# Altium PCB rocket_main.PcbDoc (part 1 of 2)
Units mil, origin at the board's own origin, x right, y up, seen from the top; angles counter-clockwise.
Board outline 3500 x 8650 mil, 4 copper layers (Top Copper, Signal Layer 1, Signal Layer 2, Bottom Copper), stack 61.811 mil thick; 167 components, 107 nets, 665 pads, 215 vias.
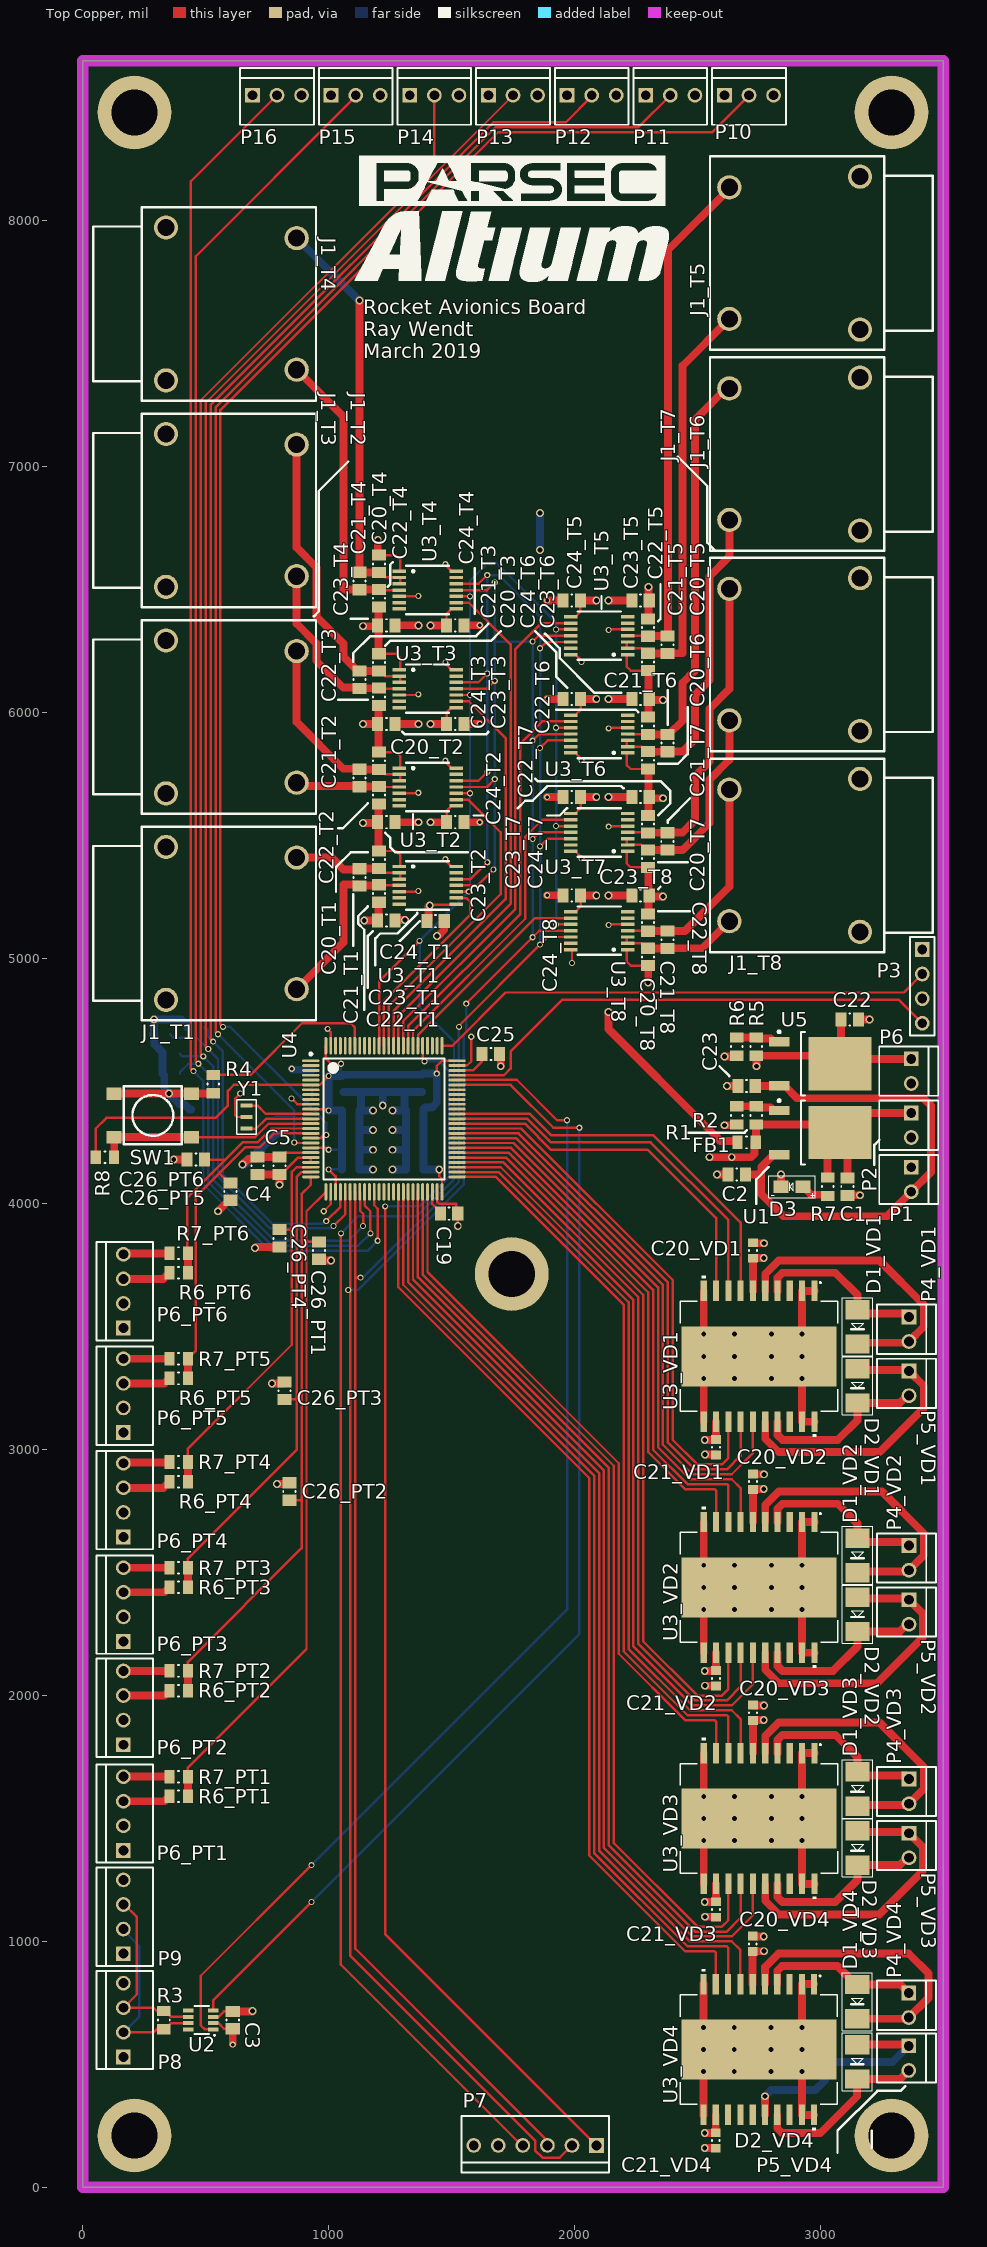
[diagram p0: Top Copper view]
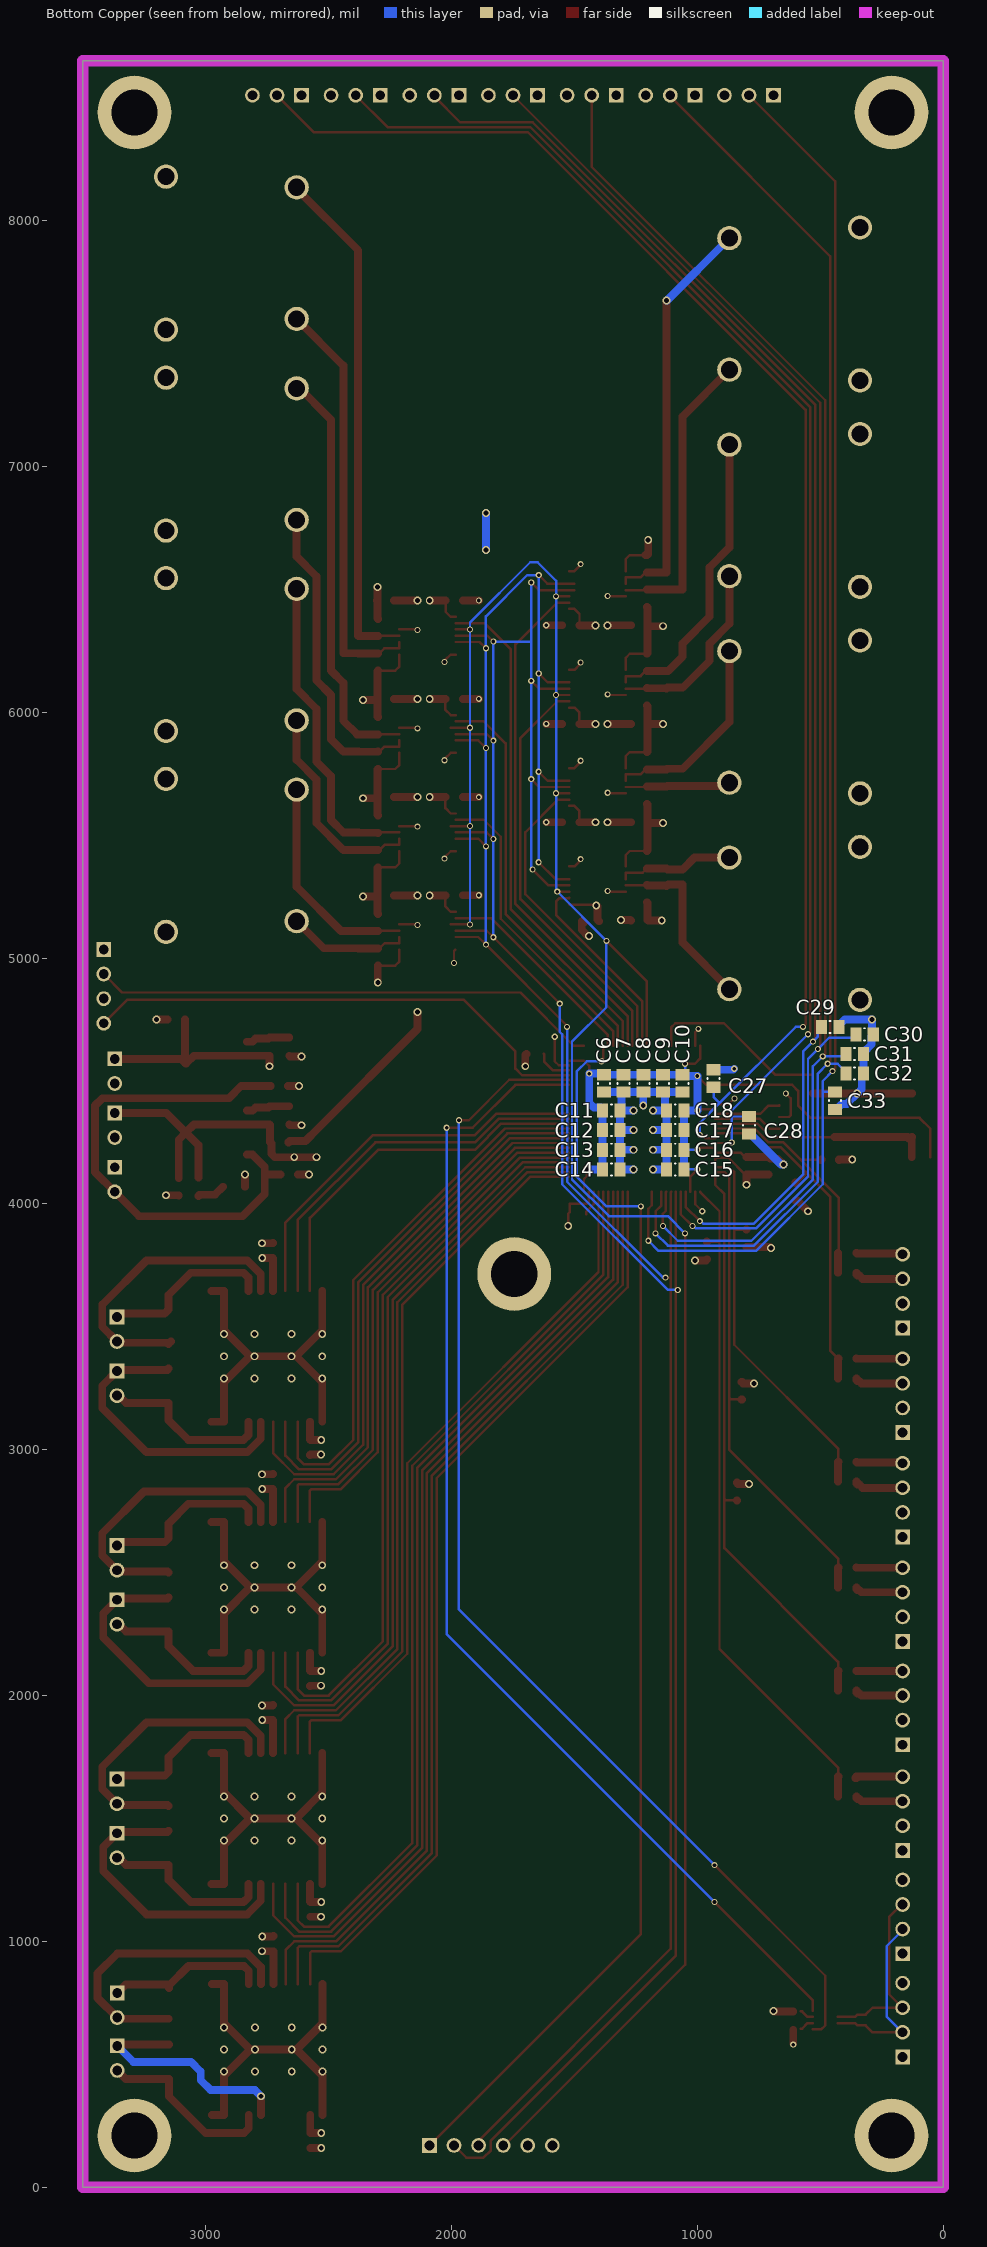
[diagram p1: Bottom Copper view, seen from below]
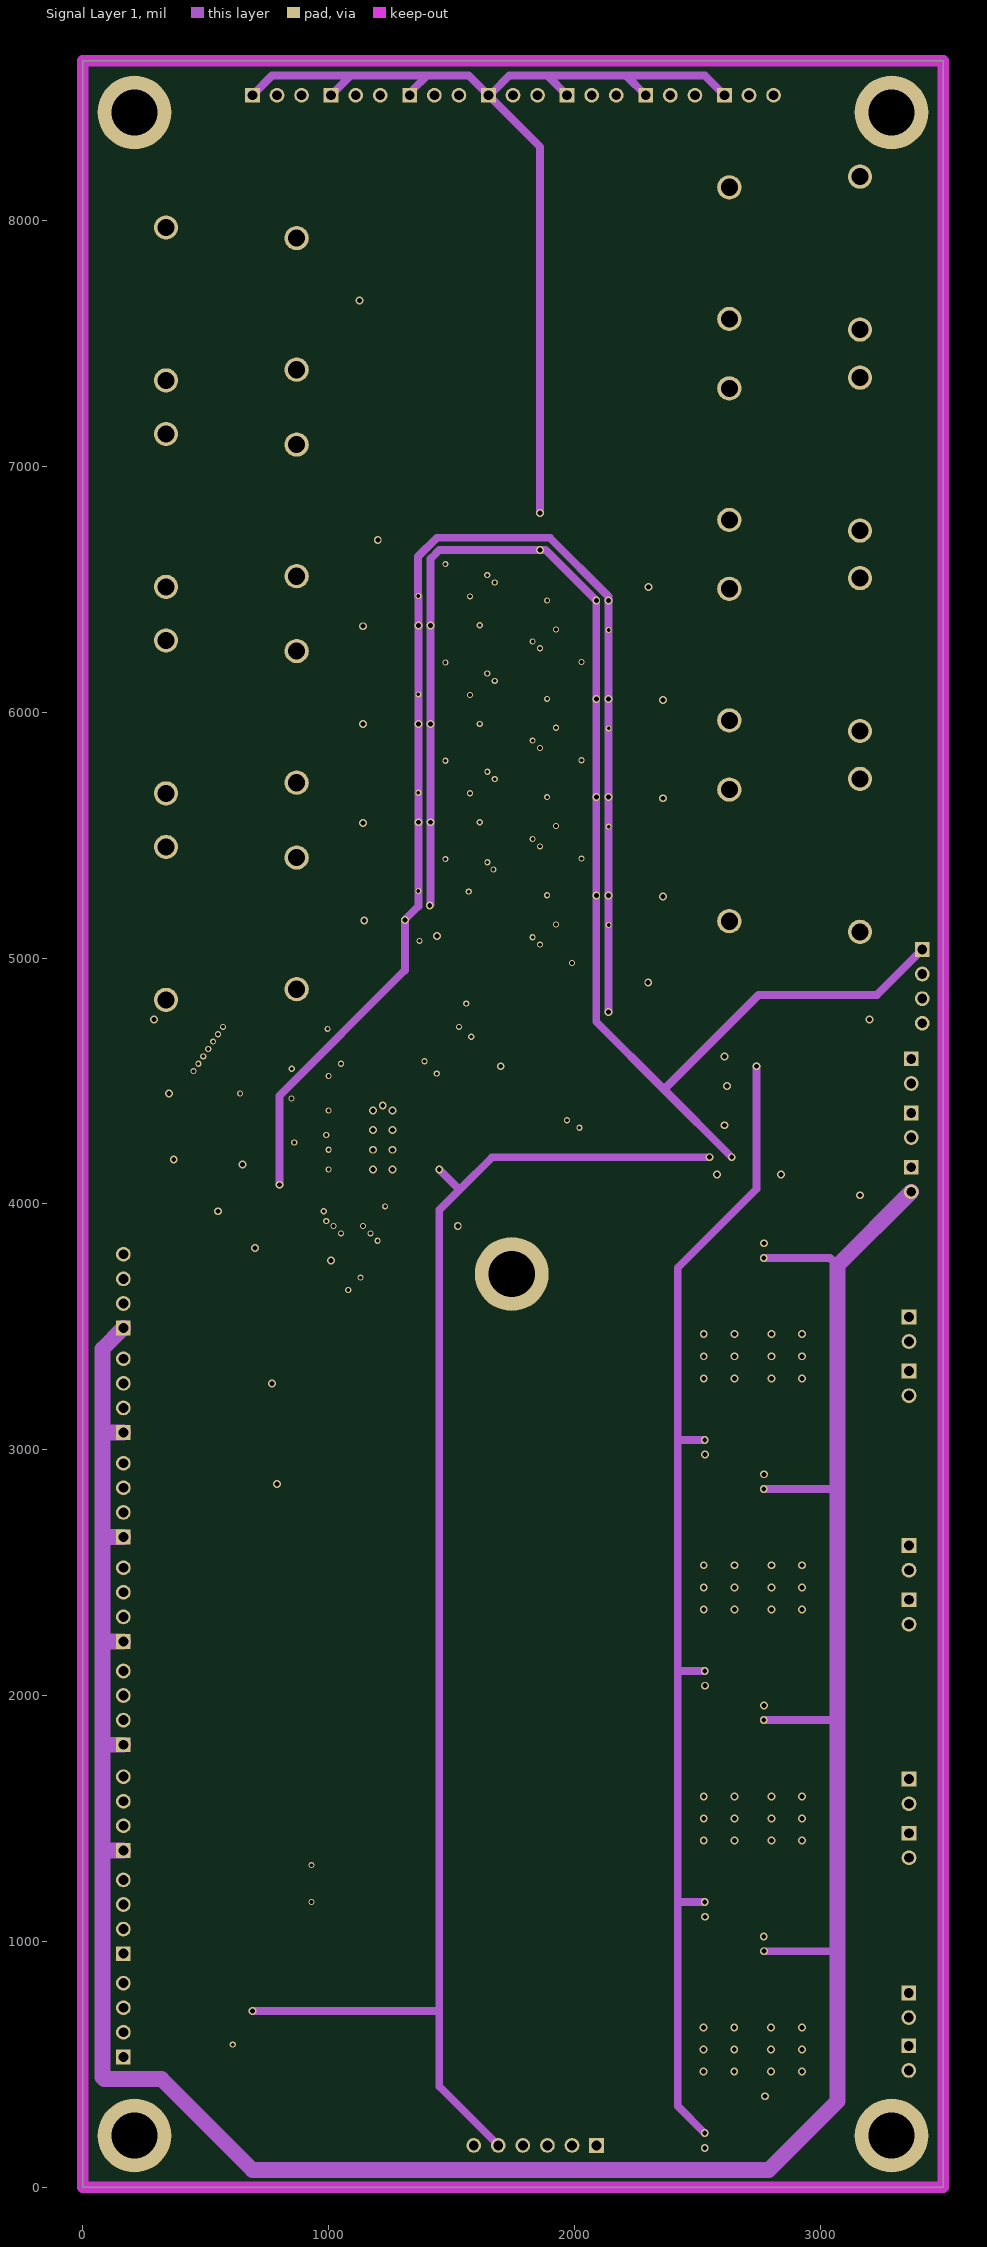
[diagram p2: Signal Layer 1]
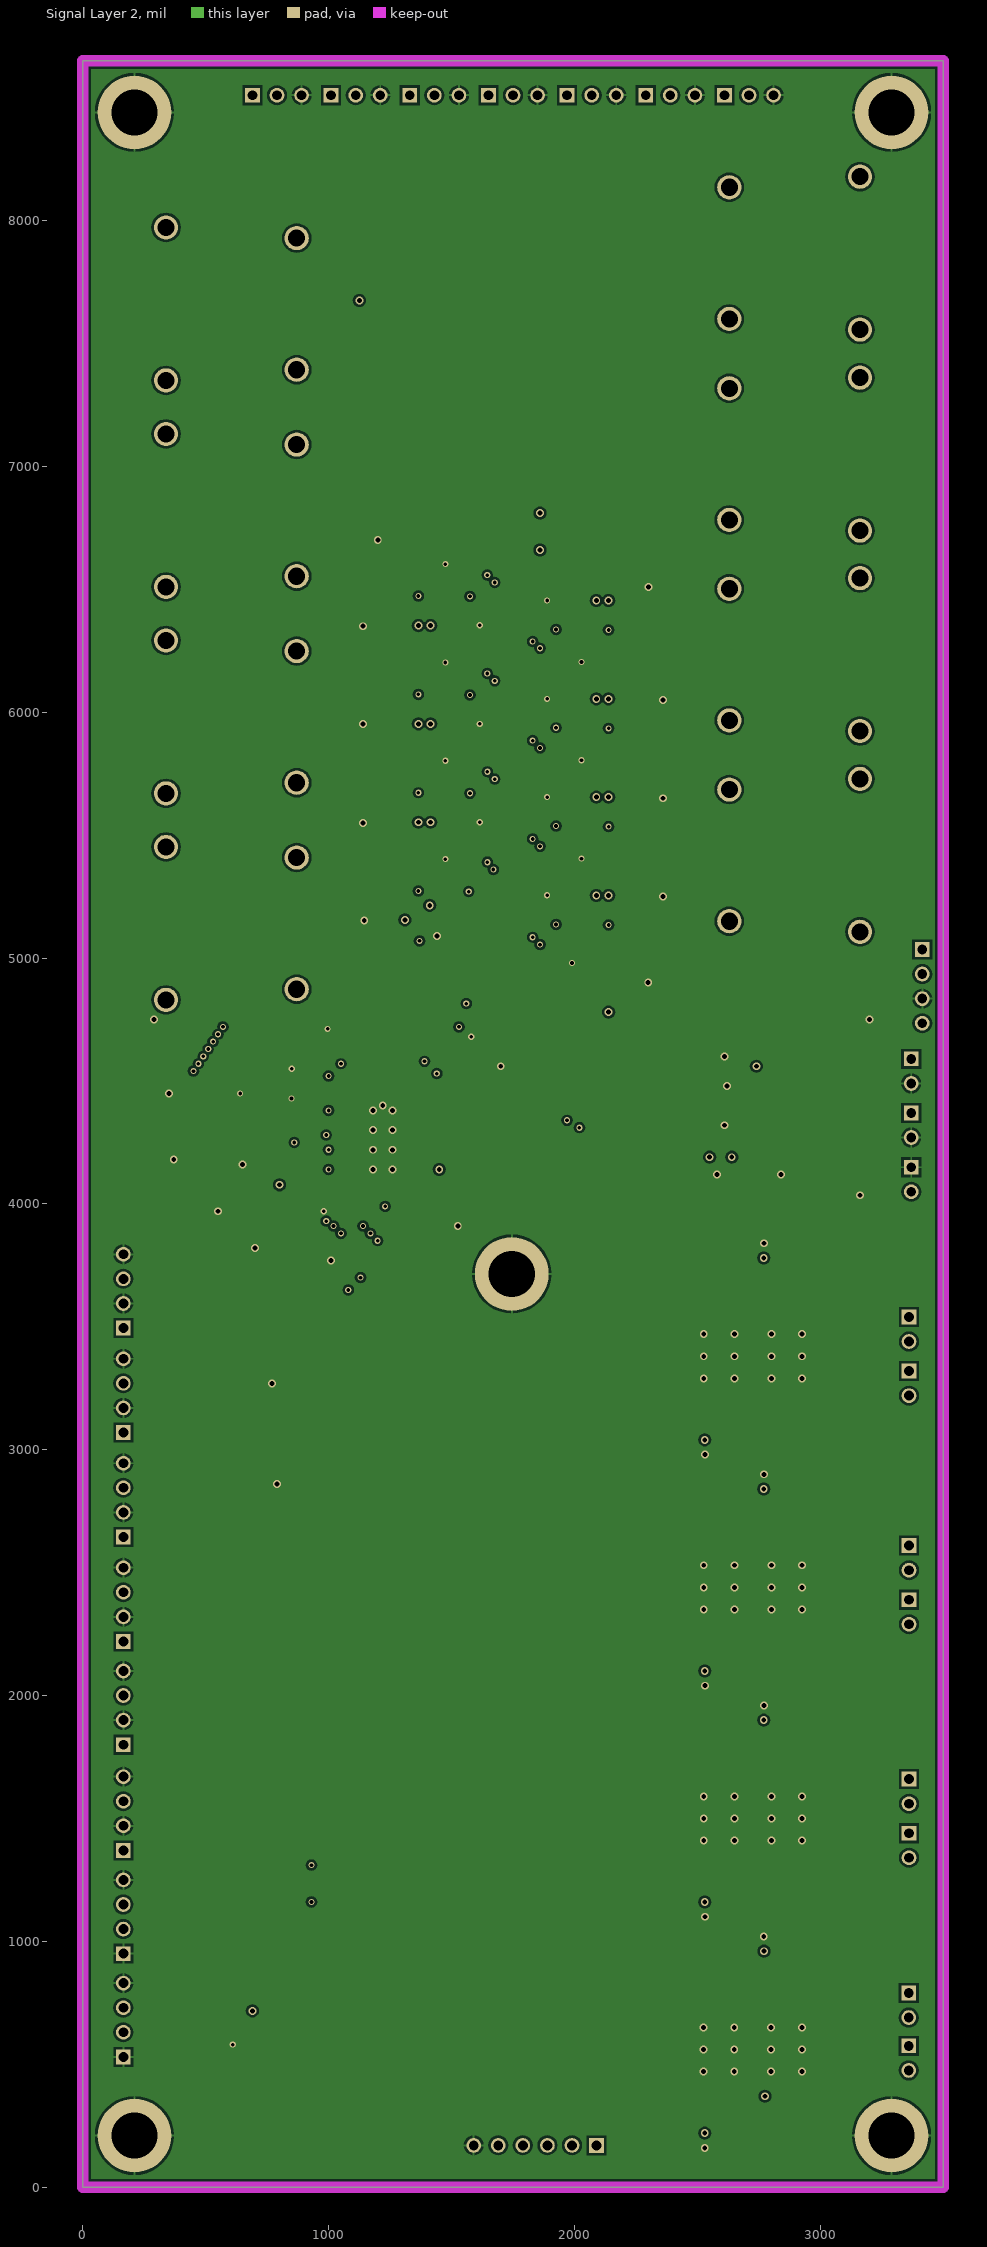
[diagram p3: Signal Layer 2]
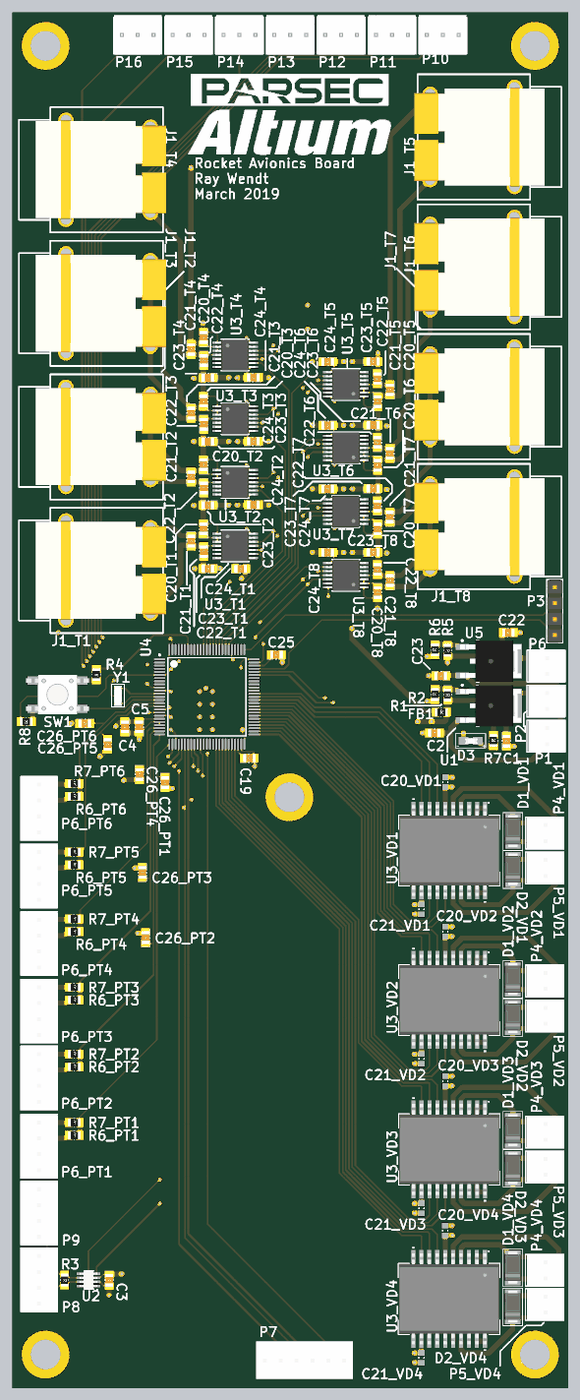
[diagram p5: 3D render of the assembled board from above, using the file's embedded part models]
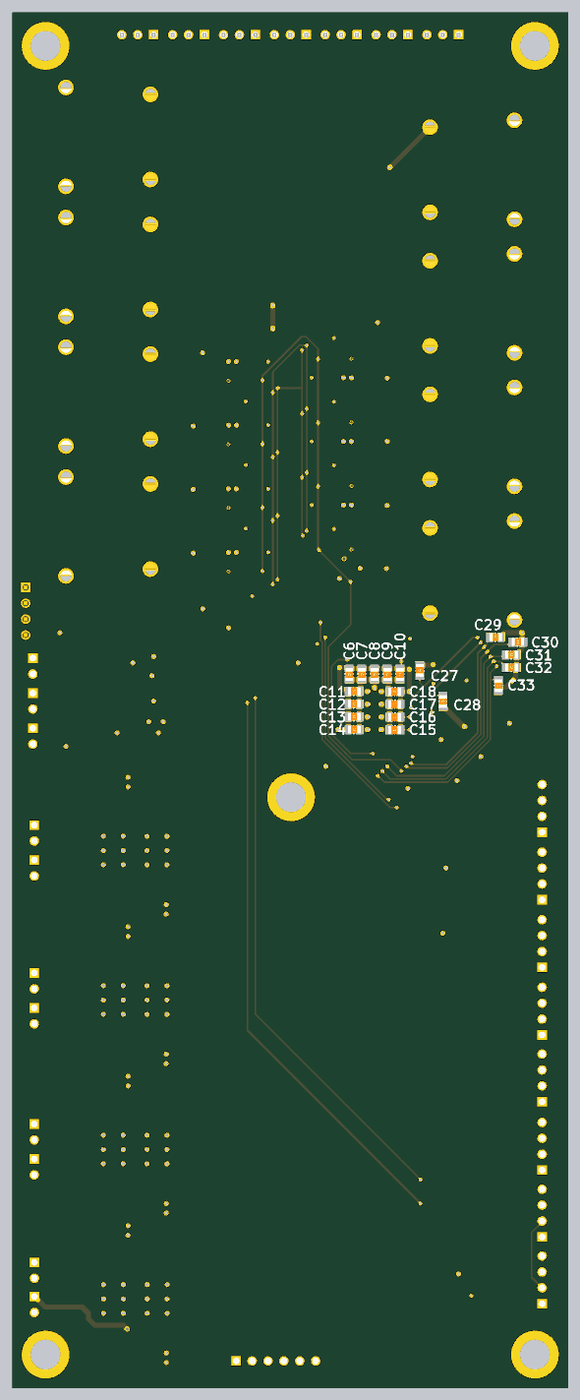
[diagram p6: 3D render of the assembled board from below, using the file's embedded part models]

## Layer stack, top to bottom
Top Mask: solder mask 0.5906, Solder Resist, Dk 3.8
Top Copper: signal copper 1.3779
Dielectric 1: prepreg 3.937, 2313, Dk 4.05
Signal Layer 1: signal copper 0.6889
Core: core 49.8031, FR-4, Dk 4.5
Signal Layer 2: signal copper 0.6889
Dielectric 2: prepreg 3.937, 2313, Dk 4.05
Bottom Copper: signal copper 1.3779
Bottom Mask: solder mask 0.5906, Solder Resist, Dk 3.8

## Board outline
0,0 3500,0 3500,8650 0,8650

## Design rules (kind name [scope] priority, off if disabled: settings)
Clearance [All] p1: gap=10 ignorepadtopadclearanceinfootprint=FALSE except(0: Arc-Hole Track-Hole SMDPad-Hole THPad-Hole Via-Hole Fill-Hole Poly-Hole Region-Hole Text-Hole; 3.5: Arc-Arc Arc-Track Track-Track; 5: Arc-SMDPad Arc-Via Track-SMDPad Track-Via SMDPad-SMDPad)
HoleSize [All] p1: absolutevalues=TRUE maxlimit=200 minlimit=7.87 maxpercent=80.000 minpercent=20.000
MinimumSolderMaskSliver [All] p1: minsoldermaskwidth=1.5
PlaneConnect PlaneConnect_1 [IsVia] p1: planeconnectstyle=Direct reliefexpansion=20 reliefentries=4 reliefconductorwidth=10 reliefairgap=10
PlaneConnect [All] p2: planeconnectstyle=Relief reliefexpansion=20 reliefentries=4 reliefconductorwidth=10 reliefairgap=10
PolygonConnect via_direct [IsVia] p1: connectstyle=Direct reliefconductorwidth=10 reliefentries=4 polygonreliefangle="90 Angle" airgapwidth=10
PolygonConnect [All] p2: connectstyle=Relief reliefconductorwidth=10 reliefentries=4 polygonreliefangle="90 Angle" airgapwidth=10
RoutingVias [All] p1: holewidth=15 width=25 viastyle="Through Hole" minholewidth=10 minwidth=15 maxholewidth=20 maxwidth=32
SilkToSilkClearance [All] p1: silktosilkclearance=6
SilkToSolderMaskClearance [IsPad] p1: minsilkscreentomaskgap=4 clearancetoexposedcopper=TRUE
SolderMaskExpansion [All] p1: expansion=4
Width [All] p1: maxlimit=64 minlimit=10 preferedwidth=10
25 further rules are at their usual default settings.

## Classes and differential pairs
component class IMU: P7
channel class valve_schematic: VD1 VD2 VD3 VD4
channel class Temp_converter: T1 T2 T3 T4 T5 T6 T7 T8
channel class Pressure_Transducer: PT1 PT2 PT3 PT4 PT5 PT6
net class SOL_B_inD[1..4]: SOL_B_inD1 SOL_B_inD2 SOL_B_inD3 SOL_B_inD4 SOL_B_inD5
net class SOL_B_inC[1..4]: SOL_B_inC1 SOL_B_inC2 SOL_B_inC3 SOL_B_inC4 SOL_B_inC5
net class SOL_A_inD[1..4]: SOL_A_inD1 SOL_A_inD2 SOL_A_inD3 SOL_A_inD4 SOL_A_inD5
net class SOL_A_inC[1..4]: SOL_A_inC1 SOL_A_inC2 SOL_A_inC3 SOL_A_inC4 SOL_A_inC5
net class ENABLEB[1..4]: ENABLEB1 ENABLEB2 ENABLEB3 ENABLEB4
net class ENABLEA[1..4]: ENABLEA1 ENABLEA2 ENABLEA3 ENABLEA4
net class CS[1..8]: CS1 CS2 CS3 CS4 CS5 CS6 CS7 CS8 CS9
net class ADC_IN[1..6]: ADC_IN1 ADC_IN2 ADC_IN3 ADC_IN4 ADC_IN5 ADC_IN6
component class VD4: C20_VD4 C21_VD4 D1_VD4 D2_VD4 P4_VD4 P5_VD4 U3_VD4
component class VD3: C20_VD3 C21_VD3 D1_VD3 D2_VD3 P4_VD3 P5_VD3 U3_VD3
component class VD2: C20_VD2 C21_VD2 D1_VD2 D2_VD2 P4_VD2 P5_VD2 U3_VD2
component class VD1: C20_VD1 C21_VD1 D1_VD1 D2_VD1 P4_VD1 P5_VD1 U3_VD1
component class T8: C20_T8 C21_T8 C22_T8 C23_T8 C24_T8 J1_T8 U3_T8
component class T7: C20_T7 C21_T7 C22_T7 C23_T7 C24_T7 J1_T7 U3_T7
component class T6: C20_T6 C21_T6 C22_T6 C23_T6 C24_T6 J1_T6 U3_T6
component class T5: C20_T5 C21_T5 C22_T5 C23_T5 C24_T5 J1_T5 U3_T5
component class T4: C20_T4 C21_T4 C22_T4 C23_T4 C24_T4 J1_T4 U3_T4
component class T3: C20_T3 C21_T3 C22_T3 C23_T3 C24_T3 J1_T3 U3_T3
component class T2: C20_T2 C21_T2 C22_T2 C23_T2 C24_T2 J1_T2 U3_T2
component class T1: C20_T1 C21_T1 C22_T1 C23_T1 C24_T1 J1_T1 U3_T1
component class rocket_main_micro: C3 C4 C5 C6 C7 C8 C9 C10 C11 C12 C13 C14 C15 C16 C17 C18 C19 C25 C27 C28 C29 C30 C31 C32 C33 P3 P8 P9 P10 P11 P12 P13 P14 P15 P16 R3 R4 R8 SW1 U2 U4 Y1
component class PT6: C26_PT6 P6_PT6 R6_PT6 R7_PT6
component class PT5: C26_PT5 P6_PT5 R6_PT5 R7_PT5
component class PT4: C26_PT4 P6_PT4 R6_PT4 R7_PT4
component class PT3: C26_PT3 P6_PT3 R6_PT3 R7_PT3
component class PT2: C26_PT2 P6_PT2 R6_PT2 R7_PT2
component class PT1: C26_PT1 P6_PT1 R6_PT1 R7_PT1
component class POWER: C1 C2 C22 C23 D3 FB1 P1 P2 P6 R1 R2 R5 R6 R7 U1 U5

## Components (designator, comment, footprint, x,y, rotation, side; value= is the part's Value field where it differs from the comment)
C1 "1uF" C0805 3110,4070 r270 top
C2 "0.1uF" C0805 2660,4119.57 r180 top
C3 "100n" C0805 610,680 r270 top
C4 "100n" C0805 710,4155 r90 top
C5 "1u" C0805 800,4155 r90 top
C6 "100n" C0805 1380,4490 r270 bottom
C7 "100n" C0805 1300,4490 r270 bottom
C8 "100n" C0805 1220,4490 r270 bottom
C9 "100n" C0805 1140,4490 r270 bottom
C10 "4u7" C0805 1060,4490 r270 bottom
C11 "100n" C0805 1350,4380 r180 bottom
C12 "100n" C0805 1350,4300 r180 bottom
C13 "100n" C0805 1350,4220 r180 bottom
C14 "100n" C0805 1350,4140 r180 bottom
C15 "100n" C0805 1090,4140 r0 bottom
C16 "100n" C0805 1090,4220 r0 bottom
C17 "100n" C0805 1090,4300 r0 bottom
C18 "100n" C0805 1090,4380 r0 bottom
C19 "2u2" C0805 1490,3960 r0 top
C20_T1 "0.01uF" C0805 1204.92,5400.2 r90 top (schematic designator C20)
C20_T2 "0.01uF" C0805 1204.92,5802.6 r90 top (schematic designator C20)
C20_T3 "0.01uF" C0805 1204.92,6202.6 r90 top (schematic designator C20)
C20_T4 "0.01uF" C0805 1205.04,6603.82 r90 top (schematic designator C20)
C20_T5 "0.01uF" C0805 2299.29,6204.57 r270 top (schematic designator C20)
C20_T6 "0.01uF" C0805 2298.74,5804.57 r270 top (schematic designator C20)
C20_T7 "0.01uF" C0805 2298.74,5404.57 r270 top (schematic designator C20)
C20_T8 "0.01uF" C0805 2298.74,5004.57 r270 top (schematic designator C20)
C20_VD1 "1 uF" C0603 2726,3810 r90 top (schematic designator C20)
C20_VD2 "1 uF" C0603 2726,2870 r90 top (schematic designator C20)
C20_VD3 "1 uF" C0603 2726,1930 r90 top (schematic designator C20)
C20_VD4 "1 uF" C0603 2725,990 r90 top (schematic designator C20)
C21_T1 "0.1uF" C0805 1124.92,5328.03 r270 top (schematic designator C21)
C21_T2 "0.1uF" C0805 1125.57,5732.6 r270 top (schematic designator C21)
C21_T3 "0.1uF" C0805 1124.92,6132.6 r270 top (schematic designator C21)
C21_T4 "0.1uF" C0805 1124.92,6533.82 r270 top (schematic designator C21)
C21_T5 "0.1uF" C0805 2378.86,6274.57 r90 top (schematic designator C21)
C21_T6 "0.1uF" C0805 2378.21,5874.57 r90 top (schematic designator C21)
C21_T7 "0.1uF" C0805 2377.78,5474.57 r90 top (schematic designator C21)
C21_T8 "0.1uF" C0805 2378.86,5074.57 r90 top (schematic designator C21)
C21_VD1 "1 uF" C0603 2576,3010 r270 top (schematic designator C21)
C21_VD2 "1 uF" C0603 2576,2070 r270 top (schematic designator C21)
C21_VD3 "1 uF" C0603 2576,1130 r270 top (schematic designator C21)
C21_VD4 "1 uF" C0603 2575,190 r270 top (schematic designator C21)
C22 "1uF" C0805 3120,4750 r0 top
C22_T1 "0.01uF" C0805 1204.92,5262.6 r270 top (schematic designator C22)
C22_T2 "0.01uF" C0805 1204.92,5662.6 r270 top (schematic designator C22)
C22_T3 "0.01uF" C0805 1204.92,6062.6 r270 top (schematic designator C22)
C22_T4 "0.01uF" C0805 1205.04,6463.82 r270 top (schematic designator C22)
C22_T5 "0.01uF" C0805 2298.74,6344.57 r90 top (schematic designator C22)
C22_T6 "0.01uF" C0805 2298.74,5944.57 r90 top (schematic designator C22)
C22_T7 "0.01uF" C0805 2298.74,5544.57 r90 top (schematic designator C22)
C22_T8 "0.01uF" C0805 2299.29,5144.57 r90 top (schematic designator C22)
C23 "0.1uF" C0805 2700,4480.24 r180 top
C23_T1 "0.1uF" C0805 1234.92,5152.6 r180 top (schematic designator C23)
C23_T2 "0.1uF" C0805 1234.92,5552.6 r180 top (schematic designator C23)
C23_T3 "0.1uF" C0805 1234.92,5952.6 r180 top (schematic designator C23)
C23_T4 "0.1uF" C0805 1234.92,6353.82 r180 top (schematic designator C23)
C23_T5 "0.1uF" C0805 2268.86,6454.57 r0 top (schematic designator C23)
C23_T6 "0.1uF" C0805 2268.86,6054.57 r0 top (schematic designator C23)
C23_T7 "0.1uF" C0805 2268.86,5654.57 r0 top (schematic designator C23)
C23_T8 "0.1uF" C0805 2268.86,5254.57 r0 top (schematic designator C23)
C24_T1 "0.1uF" C0805 1435,5150 r0 top (schematic designator C24)
C24_T2 "0.1uF" C0805 1514.92,5552.6 r0 top (schematic designator C24)
C24_T3 "0.1uF" C0805 1514.92,5952.6 r0 top (schematic designator C24)
C24_T4 "0.1uF" C0805 1514.92,6353.82 r0 top (schematic designator C24)
C24_T5 "0.1uF" C0805 1988.86,6454.57 r180 top (schematic designator C24)
C24_T6 "0.1uF" C0805 1988.86,6054.57 r180 top (schematic designator C24)
C24_T7 "0.1uF" C0805 1988.86,5654.57 r180 top (schematic designator C24)
C24_T8 "0.1uF" C0805 1988.86,5255.28 r180 top (schematic designator C24)
C25 "2u2" C0805 1660,4610 r0 top
C26_PT1 "100n" C0805 960.98,3810 r270 top (schematic designator C26)
C26_PT2 "100n" C0805 840,2830 r90 top (schematic designator C26)
C26_PT3 "100n" C0805 820,3240 r90 top (schematic designator C26)
C26_PT4 "100n" C0805 800,3860 r270 top (schematic designator C26)
C26_PT5 "100n" C0805 600,4050 r270 top (schematic designator C26)
C26_PT6 "100n" C0805 460,4180 r180 top (schematic designator C26)
C27 "100n" C0805 934.1,4510 r90 bottom
C28 "100n" C0805 790,4320 r270 bottom
C29 "100n" C0805 460,4720 r180 bottom
C30 "100n" C0805 320,4690 r180 bottom
C31 "100n" C0805 360,4610 r180 bottom
C32 "100n" C0805 360,4530 r180 bottom
C33 "100n" C0805 440,4420 r270 bottom
D1_VD1 "824501141" DIODE-SMA 3151.24,3604.45 r90 top (schematic designator D1)
D1_VD2 "824501141" DIODE-SMA 3151,2674.21 r90 top (schematic designator D1)
D1_VD3 "824501141" DIODE-SMA 3151,1724.21 r90 top (schematic designator D1)
D1_VD4 "824501141" DIODE-SMA 3150.24,859.21 r90 top (schematic designator D1)
D2_VD1 "824501141" DIODE-SMA 3151.24,3364.45 r90 top (schematic designator D2)
D2_VD2 "824501141" DIODE-SMA 3151,2434.45 r90 top (schematic designator D2)
D2_VD3 "824501141" DIODE-SMA 3151,1484.45 r90 top (schematic designator D2)
D2_VD4 "824501141" DIODE-SMA 3150,614.45 r90 top (schematic designator D2)
D3 "LED" 0805LED 2930,4070 r180 top
FB1 "FERRITE" R0805 2700,4250 r0 top
J1_T1 "PCC-SMP" PCC-SMP 870,5141.02 r90 top (schematic designator J1)
J1_T2 "PCC-SMP" PCC-SMP 870,5981.02 r90 top (schematic designator J1)
J1_T3 "PCC-SMP" PCC-SMP 870,6821.02 r90 top (schematic designator J1)
J1_T4 "PCC-SMP" PCC-SMP 870,7661.02 r90 top (schematic designator J1)
J1_T5 "PCC-SMP" PCC-SMP 2630,7867.72 r270 top (schematic designator J1)
J1_T6 "PCC-SMP" PCC-SMP 2630,7050 r270 top (schematic designator J1)
J1_T7 "PCC-SMP" PCC-SMP 2630,6234.57 r270 top (schematic designator J1)
J1_T8 "PCC-SMP" PCC-SMP 2630,5417.72 r270 top (schematic designator J1)
P1 "Molex KK 1x2" "Molex KK 2x1" 3370,4099.13 r0 top
P2 "Molex KK 1x2" "Molex KK 2x1" 3370,4320 r0 top
P3 "Header 4" "4X1 BREAKAWAY" 3415,4835 r0 top
P4_VD1 "Molex KK 1x2" "Molex KK 2x1" 3361,3490 r0 top (schematic designator P4)
P4_VD2 "Molex KK 1x2" "Molex KK 2x1" 3361,2560 r0 top (schematic designator P4)
P4_VD3 "Molex KK 1x2" "Molex KK 2x1" 3361,1610 r0 top (schematic designator P4)
P4_VD4 "Molex KK 1x2" "Molex KK 2x1" 3360,740 r0 top (schematic designator P4)
P5_VD1 "Molex KK 1x2" "Molex KK 2x1" 3361,3270 r0 top (schematic designator P5)
P5_VD2 "Molex KK 1x2" "Molex KK 2x1" 3361,2340 r0 top (schematic designator P5)
P5_VD3 "Molex KK 1x2" "Molex KK 2x1" 3361,1390 r0 top (schematic designator P5)
P5_VD4 "Molex KK 1x2" "Molex KK 2x1" 3360,525 r0 top (schematic designator P5)
P6 "Molex KK 1x2" "Molex KK 2x1" 3370,4540 r0 top
P6_PT1 "Molex KK 1x4" "Molex KK 4x1" 165,1570 r180 top (schematic designator P6)
P6_PT2 "Molex KK 1x4" "Molex KK 4x1" 165,2000 r180 top (schematic designator P6)
P6_PT3 "Molex KK 1x4" "Molex KK 4x1" 165,2420 r180 top (schematic designator P6)
P6_PT4 "Molex KK 1x4" "Molex KK 4x1" 165,2845 r180 top (schematic designator P6)
P6_PT5 "Molex KK 1x4" "Molex KK 4x1" 165,3270 r180 top (schematic designator P6)
P6_PT6 "Molex KK 1x4" "Molex KK 4x1" 165,3695 r180 top (schematic designator P6)
P7 "1x6 Connector" "Molex KK 6x1" 1890,170 r270 top
P8 "Molex KK 1x4" "Molex KK 4x1" 165,730 r180 top
P9 "Molex KK 1x4" "Molex KK 4x1" 165,1150 r180 top
P10 "Molex KK 1x4" "Molex KK 3x1" 2810,8510 r90 top
P11 "Molex KK 1x4" "Molex KK 3x1" 2490,8510 r90 top
P12 "Molex KK 1x4" "Molex KK 3x1" 2170,8510 r90 top
P13 "Molex KK 1x4" "Molex KK 3x1" 1850,8510 r90 top
P14 "Molex KK 1x4" "Molex KK 3x1" 1530,8510 r90 top
P15 "Molex KK 1x4" "Molex KK 3x1" 1210,8510 r90 top
P16 "Molex KK 1x4" "Molex KK 3x1" 890,8510 r90 top
R1 "240R" R0805 2740,4360 r270 top
R2 "390R" R0805 2660,4360 r90 top
R3 "120R" R0805 330,680 r270 top
R4 "100R" R0805 530,4487.4 r270 top
R5 "240R" R0805 2740,4640 r270 top
R6 "536R" R0805 2660,4640 r90 top
R6_PT1 "240R" R0805 390,1590 r0 top (schematic designator R6)
R6_PT2 "240R" R0805 390,2020 r0 top (schematic designator R6)
R6_PT3 "240R" R0805 390,2440 r0 top (schematic designator R6)
R6_PT4 "240R" R0805 390,2870 r0 top (schematic designator R6)
R6_PT5 "240R" R0805 390,3290 r0 top (schematic designator R6)
R6_PT6 "240R" R0805 390,3720 r0 top (schematic designator R6)
R7 "2k" R0805 3030,4070 r90 top
R7_PT1 "464R" R0805 390,1670 r0 top (schematic designator R7)
R7_PT2 "464R" R0805 390,2100 r0 top (schematic designator R7)
R7_PT3 "464R" R0805 390,2520 r0 top (schematic designator R7)
R7_PT4 "464R" R0805 390,2950 r0 top (schematic designator R7)
R7_PT5 "464R" R0805 390,3370 r0 top (schematic designator R7)
R7_PT6 "464R" R0805 390,3800 r0 top (schematic designator R7)
R8 "1K" R0805 90,4190 r180 top
SW1 "Push Switch" PUSHBUTTON 285,4360 r180 top
U1 "LM317" D-PAK 3000,4290 r0 top
U2 "TCAN332DCNT" SOT-23-8 480,680 r90 top
U3_T1 "MAXIM TSSOP14" "MAXIM TSSOP14" 1404.92,5372.6 r0 top (schematic designator U3)
U3_T2 "MAXIM TSSOP14" "MAXIM TSSOP14" 1404.92,5772.6 r0 top (schematic designator U3)
U3_T3 "MAXIM TSSOP14" "MAXIM TSSOP14" 1404.92,6172.6 r0 top (schematic designator U3)
U3_T4 "MAXIM TSSOP14" "MAXIM TSSOP14" 1404.92,6573.82 r0 top (schematic designator U3)
U3_T5 "MAXIM TSSOP14" "MAXIM TSSOP14" 2098.86,6234.57 r180 top (schematic designator U3)
U3_T6 "MAXIM TSSOP14" "MAXIM TSSOP14" 2098.86,5834.57 r180 top (schematic designator U3)
U3_T7 "MAXIM TSSOP14" "MAXIM TSSOP14" 2098.86,5434.57 r180 top (schematic designator U3)
U3_T8 "MAXIM TSSOP14" "MAXIM TSSOP14" 2098.86,5034.57 r180 top (schematic designator U3)
U3_VD1 "" PowerSO-20 2751,3380 r270 top value=Value (schematic designator U3)
U3_VD2 "" PowerSO-20 2751,2440 r270 top value=Value (schematic designator U3)
U3_VD3 "" PowerSO-20 2751,1500 r270 top value=Value (schematic designator U3)
U3_VD4 "" PowerSO-20 2750,560 r270 top value=Value (schematic designator U3)
U4 "MC-ARM-STM32F446-LQFP100" STM-LQFP100_N 1225,4346.1 r0 top
U5 "LM317" D-PAK 3000,4570 r0 top
Y1 "CSTCE8M00" "8MHZ CERAMIC RESONATOR" 666.02,4306.26 r90 top

## Footprints (in the part's own frame and the unit in brackets; to place one, negate y for a bottom-side part, rotate by r counter-clockwise, add the part's x,y. Pads: shape width x height; smd on the part's side, far side on the other; paste and mask are expansions set on the pad)
"4X1 BREAKAWAY" [mil] "4x1 segment of  a breakaway pin header"
  rect 60x60 hole 40: 1(0,200)
  round 60 hole 40: 2(0,100) 3(0,0) 4(0,-100)
  silkscreen extent -50,-150 50,250, body extent -50,-150 50,250, height 374
"8MHZ CERAMIC RESONATOR" [mm] "8MHz Ceramic Resonator Murata"
  rect 0.4x1.2 smd: 1(0,0) 2(1.2,0) 3(2.4,0)
  silkscreen extent -0.6,-1 3,1, body extent -0.4,-0.65 2.8,0.65, height 0.7
0805LED [mil]
  rect 60x50 smd: A(0,0) K(90,0)
  silkscreen extent -50,-45 140,45, body extent -1,-16 81,20, height 33
C0603 [mm] "Chip Capacitor, Body 1.6x0.8mm, Height 1.0mm, IPC Medium Density"
  rect 0.9x1 smd: 1(-0.8,0) 2(0.8,0)
  silkscreen extent -0.05,-0.4 0.05,0.4, body extent -0.87,-0.48 0.88,0.47, height 1
C0805 [mm] "Chip Capacitor, Body 2.0x1.2mm, Height 0.75mm, IPC Medium Density"
  rect 1.15x1.45 smd: 1(-0.9,0) 2(0.9,0)
  silkscreen extent -0.05,-0.62 0.05,0.63, body extent -1.42,-0.67 1.58,0.73, height 0.93
D-PAK [mm] "D-PAK, 4-Leads, Body 6.1x6.5mm, Pitch 2.28mm, Lead Span 9.7mm, IPC Medium Density"
  rect 2.1x0.95 smd: 1(-4.25,2.28) 3(-4.25,-2.28)
  rect 6.5x5.5 smd: 4(2.05,0)
  silkscreen extent -4.37,-3.3 -1.6,3.43, body extent -4.6,-3.28 5.1,3.3, height 2.3
DIODE-SMA [mm]
  rect 2x2.5 smd: A(-0.875,0) K(-4.425,0)
  silkscreen extent -5.65,-1.58 0.35,1.55, body extent -5.2,-1.3 0,1.3, height 2.4
"MAXIM TSSOP14" [mm]
  rect 1.4x0.35 smd: 1(-3,0) 2(-3,-0.65) 3(-3,-1.3) 4(-3,-1.95) 5(-3,-2.6) 6(-3,-3.25) 7(-3,-3.9) 8(2.9,-3.9) 9(2.9,-3.25) 10(2.9,-2.6) 11(2.9,-1.95) 12(2.9,-1.3) 13(2.9,-0.65) 14(2.9,0)
  silkscreen extent -2.25,-4.45 2.15,0.55, body extent -3.25,-4.45 3.15,0.55, height 1.1
"Molex KK 2x1" [mil]
  rect 60x60 hole 40: 1(0,50)
  round 60 hole 40: 2(0,-50)
  silkscreen extent -130,-100 110,100, body extent -120,-100 110,100, height 458
"Molex KK 3x1" [mil]
  rect 60x60 hole 40: 1(0,200)
  round 60 hole 40: 2(0,100) 3(0,0)
  silkscreen extent -120,-50 110,250, body extent -126,-50 124,250, height 421
"Molex KK 4x1" [mil]
  rect 60x60 hole 40: 1(0,200)
  round 60 hole 40: 2(0,100) 3(0,0) 4(0,-100)
  silkscreen extent -120,-150 110,250, body extent -120,-150 110,250, height 458
"Molex KK 6x1" [mil]
  rect 60x60 hole 40: 1(0,200)
  round 60 hole 40: 2(0,100) 3(0,0) 4(0,-100) 5(0,-200) 6(0,-300)
  silkscreen extent -120,-350 110,250, body extent -120,-350 110,250, height 458
PCC-SMP [mm]
  round 2.5 hole 1.77: +(-6.8,0) G(-7.9,13.5) G(7.9,13.5) K(6.8,0)
  silkscreen extent -10,-2 10,21, body extent -7.82,-2.48 7.88,18.32, height 7.65
PowerSO-20 [mil]
  rect 83x25 smd paste+0 mask+0: 1(-266,225) 2(-266,175) 3(-266,125) 4(-266,75) 5(-266,25) 6(-266,-25) 7(-266,-75) 8(-266,-125) 9(-266,-175) 10(-266,-225) 11(266,-225) 12(266,-175) 13(266,-125) 14(266,-75) 15(266,-25) 16(266,25) 17(266,75) 18(266,125) 19(266,175) 20(266,225)
  rect 244x630 smd paste-314.5 mask+0: EPAD(0,0)
  silkscreen extent -327,-320 327,320, body extent -286,-315 286,315, height 142
PUSHBUTTON [mm]
  rect 1.55x1.3 smd: 1(-4,2.25) 1(4,2.25) 2(-4,-2.25) 2(4,-2.25)
  silkscreen extent -3,-3 3,3, body extent -5,-3 5,3, height 5.12
R0805 [mm] "Chip Resistor, Body 2.0x1.3mm, IPC Medium Density"
  rect 1.05x1.4 smd: 1(-0.95,0) 2(0.95,0)
  silkscreen extent -0.05,-0.6 0.05,0.6, body extent -1.46,-0.7 1.54,0.7, height 0.53
SOT-23-8 [mm] "SOT-23-8"
  rect 0.4x1.1 smd: 1(-0.975,-1.3) 2(-0.325,-1.3) 3(0.325,-1.3) 4(0.975,-1.3) 5(0.975,1.3) 6(0.325,1.3) 7(-0.325,1.3) 8(-0.975,1.3)
  silkscreen extent -1.65,-1.48 1.44,0.65, body extent -1.5,-1.4 1.5,1.4, height 1.11
STM-LQFP100_N [mm] "Thin QFP, 100-Leads, Body 14x14mm, Pitch 0.5mm, IPC Medium Density"
  oval 1.8x0.3 smd: 1(-7.55,6) 2(-7.55,5.5) 3(-7.55,5) 4(-7.55,4.5) 5(-7.55,4) 6(-7.55,3.5) 7(-7.55,3) 8(-7.55,2.5) 9(-7.55,2) 10(-7.55,1.5) 11(-7.55,1) 12(-7.55,0.5) 13(-7.55,0) 14(-7.55,-0.5) 15(-7.55,-1) 16(-7.55,-1.5) 17(-7.55,-2) 18(-7.55,-2.5) 19(-7.55,-3) 20(-7.55,-3.5) 21(-7.55,-4) 22(-7.55,-4.5) 23(-7.55,-5) 24(-7.55,-5.5) 25(-7.55,-6) 51(7.55,-6) 52(7.55,-5.5) 53(7.55,-5) 54(7.55,-4.5) 55(7.55,-4) 56(7.55,-3.5) 57(7.55,-3) 58(7.55,-2.5) 59(7.55,-2) 60(7.55,-1.5) 61(7.55,-1) 62(7.55,-0.5) 63(7.55,0) 64(7.55,0.5) 65(7.55,1) 66(7.55,1.5) 67(7.55,2) 68(7.55,2.5) 69(7.55,3) 70(7.55,3.5) 71(7.55,4) 72(7.55,4.5) 73(7.55,5) 74(7.55,5.5) 75(7.55,6)
  oval 0.3x1.8 smd: 26(-6,-7.55) 27(-5.5,-7.55) 28(-5,-7.55) 29(-4.5,-7.55) 30(-4,-7.55) 31(-3.5,-7.55) 32(-3,-7.55) 33(-2.5,-7.55) 34(-2,-7.55) 35(-1.5,-7.55) 36(-1,-7.55) 37(-0.5,-7.55) 38(0,-7.55) 39(0.5,-7.55) 40(1,-7.55) 41(1.5,-7.55) 42(2,-7.55) 43(2.5,-7.55) 44(3,-7.55) 45(3.5,-7.55) 46(4,-7.55) 47(4.5,-7.55) 48(5,-7.55) 49(5.5,-7.55) 50(6,-7.55) 76(6,7.55) 77(5.5,7.55) 78(5,7.55) 79(4.5,7.55) 80(4,7.55) 81(3.5,7.55) 82(3,7.55) 83(2.5,7.55) 84(2,7.55) 85(1.5,7.55) 86(1,7.55) 87(0.5,7.55) 88(0,7.55) 89(-0.5,7.55) 90(-1,7.55) 91(-1.5,7.55) 92(-2,7.55) 93(-2.5,7.55) 94(-3,7.55) 95(-3.5,7.55) 96(-4,7.55) 97(-4.5,7.55) 98(-5,7.55) 99(-5.5,7.55) 100(-6,7.55)
  silkscreen extent -7.67,-6.25 6.25,6.82, body extent -7,-7 7,7, height 1.6

## Part data
C1 C2 C3 C4 C5 C6 C7 C8 C9 C10 C11 C12 C13 C14 C15 C16 C17 C18 C19 C20_T1 C20_T2 C20_T3 C20_T4 C20_T5 C20_T6 C20_T7 C20_T8 C21_T1 C21_T2 C21_T3 C21_T4 C21_T5 C21_T6 C21_T7 C21_T8 C22 C22_T1 C22_T2 C22_T3 C22_T4 C22_T5 C22_T6 C22_T7 C22_T8 C23 C23_T1 C23_T2 C23_T3 C23_T4 C23_T5 C23_T6 C23_T7 C23_T8 C24_T1 C24_T2 C24_T3 C24_T4 C24_T5 C24_T6 C24_T7 C24_T8 C25 C26_PT1 C26_PT2 C26_PT3 C26_PT4 C26_PT5 C26_PT6 C27 C28 C29 C30 C31 C32 C33: library part C0805, "0805 Capacitor"
C20_VD1 C20_VD2 C20_VD3 C20_VD4 C21_VD1 C21_VD2 C21_VD3 C21_VD4: library part C0603, "0603 Capacitor"
D1_VD1 D1_VD2 D1_VD3 D1_VD4 D2_VD1 D2_VD2 D2_VD3 D2_VD4: "TVS DIODE 14V 23.2V DO214AC", Supplier Part Number 1=SMCJ120CABTR-ND, Supplier 1=Digi-Key
D3: Manufacturer="OSRAM Opto Semiconductors Inc", Manufacturer Part Number="LS T676-Q1R2-1-Z", Reel=D13
FB1: "FERRITE BEAD 0805"
J1_T1 J1_T2 J1_T3 J1_T4 J1_T5 J1_T6 J1_T7 J1_T8: "THERMOCOUPLE CONNECTOR"
P1 P2 P4_VD1 P4_VD2 P4_VD3 P4_VD4 P5_VD1 P5_VD2 P5_VD3 P5_VD4 P6: "1x2 Molex KK Connector"
P3: "Header, 4-Pin", LatestRevisionDate=17-Jul-2002, LatestRevisionNote="Re-released for DXP Platform.", Publisher="Altium Limited"
P6_PT1 P6_PT2 P6_PT3 P6_PT4 P6_PT5 P6_PT6 P8 P9 P10 P11 P12 P13 P14 P15 P16: "1x4 Molex KK Connector"
P7: library part "Molex KK 1x6", "1x6 Molex KK Connector"
R1 R2 R3 R4 R5 R6 R6_PT1 R6_PT2 R6_PT3 R6_PT4 R6_PT5 R6_PT6 R7 R7_PT1 R7_PT2 R7_PT3 R7_PT4 R7_PT5 R7_PT6 R8: library part R0805, "RESISTOR 0805"
SW1: library part PUSHBUTTON
U1 U5: "Linear Voltage Regulator"
U2: "IC TXRX CAN 3.3V SOT23-8"
U3_VD1 U3_VD2 U3_VD3 U3_VD4: library part L298P013TR, "Imported", Built_By=EMA_UL_Team, C="Copyright (C) 2015 Accelerated Designs. All rights reserved", Manufacturer_Part_Number=L298P013TR, RefDes=RefDes, Type=Type, Vendor="ST Microelectronics"
Y1: "8MHz Ceramic Resonator"

## Free pads (board coordinates)
  round 300 hole 187.5: 2(210,210) 3(3290,210) 4(1745,3715) 4(3290,8440) 5(210,8440)

## Via types
v1: diameter 32, hole 20, Top Copper to Bottom Copper, 129 vias
v2: diameter 25, hole 15, Top Copper to Bottom Copper, 86 vias

## Nets (pads, with @x,y where several pads share a name; then routed paths per layer and width w, separated by ;. In a path a pad name is that pad's centre, name@x,y a point inside that pad or via, vN(x,y) a via of type N, cw(c..) or ccw(c..) an arc to the next point about the centre after c; other vN are vias at no path point)
3V3_AVDD: C4.1 C5.1 C23_T1.1 C23_T2.1 C23_T3.1 C23_T4.1 C23_T5.1 C23_T6.1 C23_T7.1 C23_T8.1 FB1.1 U3_T1.5 U3_T2.5 U3_T3.5 U3_T4.5 U3_T5.5 U3_T6.5 U3_T7.5 U3_T8.5 U4.21 U4.22 | length 7778.4
  Top Copper w10: C5.1@800,4119.57 805.91,4119.57 874.61,4188.28 927.41,4188.28 U4.21@927.76,4188.62 U4.22@927.76,4168.94 ; U3_T1.5@1291.42,5270.24 1362.56,5270.24 v2(1364.92,5272.6) ; U3_T2.5@1291.42,5670.24 1362.56,5670.24 v2(1364.92,5672.6) ; U3_T3.5@1291.42,6070.24 1362.56,6070.24 v2(1364.92,6072.6) ; U3_T4.5@1291.42,6471.46 1363.78,6471.46 v2(1364.92,6472.6) ; v2(2138.86,5134.57) 2141.22,5136.93 U3_T8.5@2212.36,5136.93 ; v2(2138.86,5534.57) 2141.22,5536.93 U3_T7.5@2212.36,5536.93 ; v2(2138.86,5934.57) 2141.22,5936.93 U3_T6.5@2212.36,5936.93 ; v2(2138.86,6334.57) 2141.22,6336.93 U3_T5.5@2212.36,6336.93
  Top Copper w32: C4.1@710,4119.57 C5.1@800,4119.57 v1(800,4077.76) ; C23_T1.1@1270.35,5152.6 1273.07,5155.32 v1(1310,5155.32) ; C23_T2.1@1270.35,5552.6 v1(1364.92,5552.6) ; C23_T3.1@1270.35,5952.6 v1(1364.92,5952.6) ; C23_T4.1@1270.35,6353.82 1363.7,6353.82 v1(1364.92,6352.6) ; v1(2138.86,4780) 2138.86,4711.14 2544.31,4305.69 2593.93,4256.07 2657.93,4256.07 2662.6,4251.4 FB1.1@2662.6,4250 ; v1(2138.86,5254.57) C23_T8.1@2233.43,5254.57 ; v1(2138.86,5654.57) C23_T7.1@2233.43,5654.57 ; v1(2138.86,6054.57) C23_T6.1@2233.43,6054.57 ; v1(2138.86,6454.57) C23_T5.1@2233.43,6454.57
  Signal Layer 1 w32: v1(800,4077.76) 800,4440 1310,4950 v1(1310,5155.32) 1364.92,5210.24 v2(1364.92,5272.6) v2(1364.92,5672.6) v2(1364.92,6072.6) v1(1364.92,6352.6) v2(1364.92,6472.6) ; v2@1363.78,6471.46 1363.78,6633.18 1440.6,6710 1900,6710 2138.86,6471.14 v1(2138.86,6454.57) v2(2138.86,6334.57) v1(2138.86,6054.57) v2(2138.86,5934.57) v1(2138.86,5654.57) v2(2138.86,5534.57) v2(2138.86,5134.57) v1(2138.86,4780)
3V3_DVDD: C1.1 C3.1 C6.1 C7.1 C8.1 C9.1 C10.1 C11.1 C12.1 C13.1 C14.1 C15.1 C16.1 C17.1 C18.1 C24_T1.1 C24_T2.1 C24_T3.1 C24_T4.1 C24_T5.1 C24_T6.1 C24_T7.1 C24_T8.1 FB1.2 P2.1 P3.1 P7.5 P10.1 P11.1 P12.1 P13.1 P14.1 P15.1 P16.1 R1.2 R7.2 R8.2 U1.4 U2.3 U3_T1.8 U3_T2.8 U3_T3.8 U3_T4.8 U3_T5.8 U3_T6.8 U3_T7.8 U3_T8.8 U4.6 U4.11 U4.19 U4.28 U4.50 U4.75 U4.100 | length 22484.2
  Top Copper w10: R8.2@52.6,4190 52.6,4306.73 95.87,4350 540,4350 590,4400 590,4460 613.9,4483.9 U4.6@927.76,4483.9 963.9,4483.9 v2(1000,4520) ; U2.3@531.18,692.8 551.46,692.8 574.09,715.43 580,715.43 ; v1@688.03,715.43 v1(690,717.4) ; U4.19@927.76,4227.99 987.95,4227.99 ; U4.11@927.76,4385.47 v2@990.47,4385.47 ; U4.100@988.78,4643.35 988.78,4591.22 1010,4570 v2(1050,4570) ; v2(1000,4140) 1028.15,4111.85 U4.28@1028.15,4048.86 ; v1(1411.2,5214.52) 1413.85,5217.17 1519.17,5217.17 U3_T1.8@1521.06,5219.06 ; v2(1440,4530) 1440,4561.1 1461.22,4582.32 U4.75@1522.24,4582.32 ; v1(1450,4140) 1450,4112.5 1461.22,4101.28 U4.50@1461.22,4048.86 ; C24_T2.1@1479.49,5552.6 1478.43,5553.66 1480,5555.24 1480,5598.66 1500.39,5619.06 U3_T2.8@1519.09,5619.06 U3_T2.8@1521.06,5619.06 ; C24_T3.1@1479.49,5952.6 1478.43,5953.66 1480,5955.24 1480,5998.66 1500.39,6019.06 U3_T3.8@1519.09,6019.06 U3_T3.8@1521.06,6019.06 ; C24_T4.1@1479.49,6353.82 1478.43,6354.88 1479.49,6355.95 1479.49,6399.37 1500.39,6420.28 U3_T4.8@1519.09,6420.28 U3_T4.8@1521.06,6420.28 ; U3_T8.8@1982.72,5188.11 U3_T8.8@1984.69,5188.11 2003.39,5188.11 2025,5209.72 2025,5254.57 C24_T8.1@2024.29,5255.28 ; U3_T7.8@1982.72,5588.11 U3_T7.8@1984.69,5588.11 2003.39,5588.11 2025,5609.72 2025,5653.86 C24_T7.1@2024.29,5654.57 ; U3_T6.8@1982.72,5988.11 U3_T6.8@1984.69,5988.11 2003.39,5988.11 2025,6009.72 2025,6053.86 C24_T6.1@2024.29,6054.57 ; U3_T5.8@1982.72,6388.11 U3_T5.8@1984.69,6388.11 2003.39,6388.11 2024.29,6409.02 C24_T5.1@2024.29,6454.57
  Top Copper w32: C3.1@610,715.43 v1@688.03,715.43 ; C24_T1.1@1399.57,5150 1406.2,5156.64 1406.2,5209.52 v1(1411.2,5214.52) ; v1(1414.92,5552.6) C24_T2.1@1479.49,5552.6 ; v1(1414.92,5952.6) C24_T3.1@1479.49,5952.6 ; v1(1414.92,6352.6) 1478.27,6352.6 C24_T4.1@1479.49,6353.82 ; C24_T7.1@2024.29,5654.57 v1(2088.86,5654.57) ; C24_T6.1@2024.29,6054.57 v1(2088.86,6054.57) ; C24_T5.1@2024.29,6454.57 v1(2088.86,6454.57) ; C24_T8.1@2025,5254.57 v1(2088.86,5254.57) ; v1(2550,4190) v1(2640,4190) 2718.66,4190 2732.73,4204.08 2732.73,4245.33 FB1.2@2737.4,4250 2738.7,4251.3 2738.7,4321.3 R1.2@2740,4322.6 3048.11,4322.6 U1.4@3080.71,4290 ; R7.2@3030,4107.4 3030,4239.29 U1.4@3080.71,4290 ; C1.1@3110,4105.43 3110,4260.71 U1.4@3080.71,4290 ; P2.1@3370,4370 3160.71,4370 U1.4@3080.71,4290
  Signal Layer 1 w32: v1(690,717.4) 1442.6,717.4 1450,710 ; P16.1@690,8510 770,8590 1090,8590 ; P15.1@1010,8510 1090,8590 ; P14.1@1330,8510 1344,8524 1344,8534 1400,8590 ; v1@1414.92,5218.24 v1(1414.92,5552.6) v1(1414.92,5952.6) v1(1414.92,6352.6) 1414.92,6624.92 1450,6660 v1(1860,6660) 1883.43,6660 v1(2088.86,6454.57) v1(2088.86,6054.57) v1(2088.86,5654.57) v1(2088.86,5254.57) 2088.86,4741.14 2364.43,4465.57 ; v1(1450,4140) 1527.5,4062.5 1537.5,4062.5 ; P13.1@1642.5,8517.5 1570,8590 1400,8590 ; P13.1@1650,8510 P13.1@1665,8495 ; P7.5@1690.12,170.12 1450,410.24 1450,710 ; v1(1860,6810) 1860,8300 P13.1@1665,8495 ; P12.1@1970,8510 1890,8590 ; P11.1@2290,8510 2210,8590 ; v1(2550,4190) 1665,4190 1537.5,4062.5 ; P10.1@2610,8510 2531,8589 2531,8590 2210,8590 ; v1(2640,4190) 2364.43,4465.57 ; P3.1@3410,5030 3230,4850 2748.86,4850 2364.43,4465.57 ; 1090,8590 1400,8590 ; 1450,710 1450,3975 1537.5,4062.5 ; P13.1@1665,8495 1665,8520 1735,8590 1890,8590 ; 1890,8590 2210,8590
  Bottom Copper w10: v2(1000,4140) C15.1@1054.57,4140 ; v2(1000,4220) C16.1@1054.57,4220 ; v2(1050,4570) 1050,4524.57 C10.1@1054.57,4520
  Bottom Copper w32: C15.1@1054.57,4140 C16.1@1054.57,4220 C17.1@1054.57,4300 C18.1@1054.57,4380 v2(1000,4380) v2(1000,4520) 1054.57,4520 C10.1@1060,4525.43 C9.1@1140,4525.43 C8.1@1220,4525.43 C7.1@1300,4525.43 C6.1@1380,4525.43 1384.57,4530 v2(1440,4530) 1440,4411.29 1421.25,4392.54 1392.07,4392.54 1385.43,4385.91 C11.1@1385.43,4380 C12.1@1385.43,4300 C13.1@1385.43,4220 C14.1@1385.43,4140 v1(1450,4140) ; v1(1860,6660) v1(1860,6810)
+5V_VDD: C21_VD1.1 C21_VD2.1 C21_VD3.1 C21_VD4.1 C22.1 P6.1 R5.2 U3_VD1.12 U3_VD2.12 U3_VD3.12 U3_VD4.12 U5.4 | length 6194.1
  Top Copper w32: v1(2530,220) 2573.5,220 C21_VD4.1@2575,221.5 U3_VD4.12@2575,294 ; v1(2530,1160) 2574.5,1160 C21_VD3.1@2576,1161.5 U3_VD3.12@2576,1234 ; v1(2530,2100) 2574.5,2100 C21_VD2.1@2576,2101.5 U3_VD2.12@2576,2174 ; v1(2530,3040) 2574.5,3040 C21_VD1.1@2576,3041.5 U3_VD1.12@2576,3114 ; v1(2740,4560) R5.2@2740,4602.6 3048.11,4602.6 U5.4@3080.71,4570 U5.4@3084.57,4573.86 ; C22.1@3084.57,4750 U5.4@3084.57,4573.86 ; P6.1@3370,4590 3100.71,4590 U5.4@3084.57,4573.86
  Signal Layer 1 w32: v1(2530,220) 2420,330 2420,1160 ; v1(2530,1160) 2420,1160 ; v1(2530,2100) 2420,2100 ; v1(2530,3040) 2420,3040 ; v1(2740,4560) 2740,4060 2420,3740 2420,3040 ; 2420,1160 2420,2100 ; 2420,2100 2420,3040
+12V_IN: C2.1 C20_VD1.1 C20_VD2.1 C20_VD3.1 C20_VD4.1 C23.1 P1.2 P6_PT1.1 P6_PT2.1 P6_PT3.1 P6_PT4.1 P6_PT5.1 P6_PT6.1 U1.3 U3_VD1.6 U3_VD2.6 U3_VD3.6 U3_VD4.6 U5.3 | length 14604.2
  Top Copper w32: C2.1@2695.43,4119.57 2695.87,4120 2760,4120 ; U3_VD4.6@2725,826 C20_VD4.1@2725,958.5 2726.5,960 v1(2771,960) ; U3_VD3.6@2726,1766 C20_VD3.1@2726,1898.5 2727.5,1900 v1(2770,1900) ; U3_VD2.6@2726,2706 C20_VD2.1@2726,2838.5 2727.5,2840 v1(2770,2840) ; U3_VD1.6@2726,3646 C20_VD1.1@2726,3778.5 2727.5,3780 v1(2770,3780) ; C23.1@2735.43,4480.24 U5.3@2832.68,4480.24 2855.32,4480.24 2905.55,4430 3420,4430 3450,4400 3450,4129.13 P1.2@3370,4049.13 3270.87,3950 2850,3950 2760,4040 2760,4120 ; U1.3@2832.68,4200.24 2810.04,4200.24 2760,4150.2 2760,4120
  Signal Layer 1 w32: v1(2770,1900) 3070,1900 ; v1(2770,2840) 3070,2840 ; v1(2770,3780) 3039.13,3780 3070,3749.13 ; v1(2771,960) 3070,960
  Signal Layer 1 w64: P6_PT1.1@165,1370 80,1370 ; P6_PT2.1@165,1800 80,1800 ; P6_PT3.1@165,2220 80,2220 ; P6_PT4.1@165,2645 80,2645 ; P6_PT5.1@165,3070 80,3070 ; P6_PT6.1@165,3495 80,3410 80,3070 ; P1.2@3370,4049.13 3070,3749.13 3070,2840 3070,1900 3070,960 3070,350 2790,70 690,70 320,440 87.49,440 80,447.49 80,1370 ; 80,1370 80,1800 ; 80,1800 80,2220 ; 80,2220 80,2645 ; 80,2645 80,3070
ADC_IN1: C26_PT1.1 R6_PT1.2 R7_PT1.2 U4.26 | length 2747.4
  Top Copper w10: R7_PT1.2@427.4,1670 427.4,1676.89 427.4,1706.89 910,2189.49 910,3840 ; C26_PT1.1@960.98,3845.43 915.43,3845.43 910,3840 ; U4.26@988.78,4048.86 988.78,4048.78 910,3970 910,3840
  Top Copper w32: R7_PT1.2@426.42,1670.98 R7_PT1.2@427.4,1670 R6_PT1.2@427.4,1590 ; C26_PT1.1@960.98,3845.43 C26_PT1.1@961.97,3846.42
ADC_IN2: C26_PT2.1 R6_PT2.2 R7_PT2.2 U4.25 | length 2352.2
  Top Copper w10: R7_PT2.2@427.4,2100 427.4,2106.89 427.4,2136.89 890,2599.49 890,2800 ; C26_PT2.1@840,2794.57 884.57,2794.57 890,2800 ; U4.25@927.76,4109.88 927.76,4077.76 890,4040 890,2800
  Top Copper w32: R7_PT2.2@426.42,2100.98 R7_PT2.2@427.4,2100 R6_PT2.2@427.4,2020 ; C26_PT2.1@839.02,2793.58 C26_PT2.1@840,2794.57
ADC_IN3: C26_PT3.1 R6_PT3.2 R7_PT3.2 U4.24 | length 1974.2
  Top Copper w10: R7_PT3.2@427.4,2520 427.4,2526.89 427.4,2556.89 870,2999.49 870,3210 ; C26_PT3.1@820,3204.57 864.57,3204.57 870,3210 ; U4.24@927.76,4129.57 889.57,4129.57 870,4110 870,3210
  Top Copper w32: R7_PT3.2@426.42,2520.98 R7_PT3.2@427.4,2520 R6_PT3.2@427.4,2440 ; C26_PT3.1@819.02,3203.58 C26_PT3.1@820,3204.57
ADC_IN4: C26_PT4.1 R6_PT4.2 R7_PT4.2 U4.23 | length 1575.5
  Top Copper w10: R7_PT4.2@427.4,2950 427.4,2956.89 427.4,3004.4 850,3427 850,3900 ; C26_PT4.1@800,3895.43 845.43,3895.43 850,3900 ; U4.23@927.76,4149.25 869.25,4149.25 850,4130 850,3900
  Top Copper w32: R7_PT4.2@426.42,2950.98 R7_PT4.2@427.4,2950 R6_PT4.2@427.4,2870 ; C26_PT4.1@800,3895.43 C26_PT4.1@800.98,3896.42
ADC_IN5: C26_PT5.1 R6_PT5.2 R7_PT5.2 U4.16 | length 1418.2
  Top Copper w10: R7_PT5.2@415.65,3358.65 427.2,3370.2 R7_PT5.2@427.4,3370.4 ; R7_PT5.2@427.4,3370 R7_PT5.2@427.4,3370.4 ; R7_PT5.2@427.4,3376.89 R7_PT5.2@427.4,3370.4 ; C26_PT5.1@600,4085.43 594.09,4085.43 560,4119.53 560,4130 ; U4.16@927.76,4287.05 777.05,4287.05 720,4230 660,4230 560,4130 ; R7_PT5.2@427.4,3370.4 460,3403 460,4030 560,4130
  Top Copper w32: R7_PT5.2@426.42,3370.98 427.2,3370.2 R7_PT5.2@427.4,3370 R6_PT5.2@427.4,3290 ; C26_PT5.1@600,4085.43 C26_PT5.1@600.98,4086.42
ADC_IN6: C26_PT6.1 R6_PT6.2 R7_PT6.2 U4.15 | length 1010.6
  Top Copper w10: R7_PT6.2@424.57,3800 424.57,4024.57 580,4180 ; C26_PT6.1@495.43,4180 580,4180 ; U4.15@927.76,4306.73 766.73,4306.73 710,4250 650,4250 580,4180
  Top Copper w32: R6_PT6.2@427.4,3720 R7_PT6.2@427.4,3800 ; C26_PT6.1@495.43,4180 C26_PT6.1@496.42,4179.02
CAN_RX: U2.4 U4.70 | length 4778.1
  Top Copper w10: U2.4@531.18,718.39 531.18,761.49 v2(930,1160.31) ; U4.70@1522.24,4483.9 1740,4483.9 1913.9,4310 v2(2020,4310)
  Bottom Copper w10: v2(930,1160.31) 2020,2250.31 v2(2020,4310)
CAN_TX: U2.1 U4.71 | length 4873.5
  Top Copper w10: U2.1@531.18,641.61 496.65,641.61 480,658.27 480,860 v2(930,1310) ; U4.71@1522.24,4503.58 1523.46,4504.8 1765.2,4504.8 1930,4340 v2(1970,4340)
  Bottom Copper w10: v2(930,1310) 1970,2350 v2(1970,4340)
CANH: P8.2 P9.2 R3.2 U2.7 | length 758.1
  Top Copper w10: P8.2@160,630 P8.2@165,630 287.4,630 315.67,658.27 349.25,658.27 358.19,667.2 U2.7@428.82,667.2
  Bottom Copper w10: P8.2@165,630 230,695 230,980 165,1045 P9.2@165,1050
CANL: P8.3 P9.3 R3.1 U2.6 | length 746.8
  Top Copper w10: P9.3@165,1150 168.5,1150 220,1098.5 220,785 P8.3@165,730 287.4,730 315.67,701.73 349.25,701.73 358.19,692.8 U2.6@428.82,692.8
CLK: P7.4 U3_T1.10 U3_T2.10 U3_T3.10 U3_T4.10 U3_T5.10 U3_T6.10 U3_T7.10 U3_T8.10 U4.89 | length 9847.2
  Top Copper w10: v2(1050,3880) 1050,905 P7.4@1787.5,167.5 ; U4.89@1205.32,4643.35 1205.32,4905.31 v2(1370,5070) ; U3_T1.10@1521.06,5270.24 v2(1570,5270.24) ; U3_T2.10@1521.06,5670.24 v2(1575,5670.24) ; U3_T3.10@1521.06,6070.24 v2(1575,6070.24) ; U3_T4.10@1521.06,6471.46 v2(1575,6471.46) ; v2(1925,5136.93) U3_T8.10@1984.69,5136.93 U3_T8.10@2002.72,5136.93 ; v2(1925,5536.93) U3_T7.10@1984.69,5536.93 U3_T7.10@2002.72,5536.93 ; v2(1925,5936.93) U3_T6.10@1984.69,5936.93 U3_T6.10@2002.72,5936.93 ; v2(1925,6336.93) U3_T5.10@1982.72,6336.93
  Bottom Copper w10: v2(1050,3880) 1120,3950 1360,3950 1510,4100 1510,4660 1370,4800 v2(1370,5070) v2@1570.12,5270.12 ; v2@1575,5275 v2(1575,5670.24) v2(1575,6070.24) v2(1575,6471.46) 1575,6535 1650,6610 1680,6610 1925,6365 v2(1925,6336.93) v2(1925,5936.93) v2(1925,5136.93)
CS1: U3_T1.9 U4.88 | length 791.6
  Top Copper w10: U4.88@1225,4643.35 1225,4825 1575,5175 1575,5230 1562.24,5242.76 1522.95,5242.76 U3_T1.9@1521.06,5244.65
CS2: U3_T2.9 U4.87 | length 1290.8
  Top Copper w10: U4.87@1244.68,4643.35 1244.68,4804.69 1700,5260 1700,5511.36 1566.71,5644.65 U3_T2.9@1521.06,5644.65
CS3: U3_T3.9 U4.86 | length 1701.1
  Top Copper w10: U4.86@1264.37,4643.35 1264.37,4784.37 1720,5240 1720,5894.65 1570,6044.65 U3_T3.9@1521.06,6044.65
CS4: U3_T4.9 U4.85 | length 2110.7
  Top Copper w10: U4.85@1284.06,4643.35 1284.06,4764.06 1740,5220 1740,6275.87 1570,6445.87 U3_T4.9@1521.06,6445.87
CS5: U3_T5.9 U4.84 | length 2068.8
  Top Copper w10: U4.84@1303.74,4643.35 1303.74,4743.74 1760,5200 1760,6256.55 1865.97,6362.52 U3_T5.9@1982.72,6362.52
CS6: U3_T6.9 U4.83 | length 1658.8
  Top Copper w10: U4.83@1323.43,4643.35 1323.43,4723.43 1780,5180 1780,5873.46 1869.06,5962.52 U3_T6.9@1982.72,5962.52
CS7: U3_T7.9 U4.82 | length 1250.7
  Top Copper w10: U4.82@1343.11,4643.35 1343.11,4703.11 1800,5160 1800,5493.46 1869.06,5562.52 U3_T7.9@1982.72,5562.52